# EAGLE board CT_schematic (EAGLE 7.6.0)

Size 100 x 80 mm. Coordinates in mm from the lower left corner, seen from the top.
Outline: 0,0 100,0 100,80 0,80 0,0
Copper layers (1*16): Top 0.035mm / dielectric 1.5mm / Bottom 0.035mm
Design rules "default": minimum track width 10mil, minimum drill 24mil, track to track 8mil, track to pad 8mil, pad to pad 8mil, via to via 8mil, smd to smd 8mil, copper to edge 40mil, drill to drill 8mil, minimum pad ring 10mil, minimum via ring 8mil, stop-mask expansion 4mil, vias tented up to drill 0mil, thermal gap 10mil

## Footprints (pad centres in the part's own frame; a part is rotated, then mirrored left to right if it is on the bottom)
C0603 = smd 0.8 x 0.8: 1 -0.762,0; 2 0.762,0
C0402 = smd 0.5 x 0.5: 1 -0.508,0; 2 0.508,0
C0805 = smd 1.2 x 1.3: 1 -1.016,0; 2 1.016,0
C1206 = smd 1.3 x 1.6: 1 -1.524,0; 2 1.524,0
2220 = smd 1.85 x 5.5: 1 -2.55,0; 2 2.55,0
EXV-9H = smd 3.505 x 1.676: 1 -2.857,0; 2 2.857,0
L0603 = smd 0.8 x 0.8: 1 -0.762,0; 2 0.762,0
R0603 = smd 0.8 x 0.8: 1 -0.762,0; 2 0.762,0
L1210 = smd 1.2 x 2.5: 1 -1.524,0; 2 1.524,0
DR1040 = smd 1.6 x 3.2: 1 -4.458,0; 2 4.458,0
PJ-037B_PACKAGE = drill 3.7 square: 1 12,0 | drill 3.2 square: 2 6,0
LQFP100 = smd 0.3 x 1.2: 1 -6,-7.75; 2 -5.5,-7.75; 3 -5,-7.75; 4 -4.5,-7.75; 5 -4,-7.75; 6 -3.5,-7.75; 7 -3,-7.75; 8 -2.5,-7.75; 9 -2,-7.75; 10 -1.5,-7.75; 11 -1,-7.75; 12 -0.5,-7.75; 13 0,-7.75; 14 0.5,-7.75; 15 1,-7.75; 16 1.5,-7.75; 17 2,-7.75; 18 2.5,-7.75; 19 3,-7.75; 20 3.5,-7.75; 21 4,-7.75; 22 4.5,-7.75; 23 5,-7.75; 24 5.5,-7.75; 25 6,-7.75; 51 6,7.75; 52 5.5,7.75; 53 5,7.75; 54 4.5,7.75; 55 4,7.75; 56 3.5,7.75; 57 3,7.75; 58 2.5,7.75; 59 2,7.75; 60 1.5,7.75; 61 1,7.75; 62 0.5,7.75; 63 0,7.75; 64 -0.5,7.75; 65 -1,7.75; 66 -1.5,7.75; 67 -2,7.75; 68 -2.5,7.75; 69 -3,7.75; 70 -3.5,7.75; 71 -4,7.75; 72 -4.5,7.75; 73 -5,7.75; 74 -5.5,7.75; 75 -6,7.75 | smd 1.2 x 0.3: 26 7.75,-6; 27 7.75,-5.5; 28 7.75,-5; 29 7.75,-4.5; 30 7.75,-4; 31 7.75,-3.5; 32 7.75,-3; 33 7.75,-2.5; 34 7.75,-2; 35 7.75,-1.5; 36 7.75,-1; 37 7.75,-0.5; 38 7.75,0; 39 7.75,0.5; 40 7.75,1; 41 7.75,1.5; 42 7.75,2; 43 7.75,2.5; 44 7.75,3; 45 7.75,3.5; 46 7.75,4; 47 7.75,4.5; 48 7.75,5; 49 7.75,5.5; 50 7.75,6; 76 -7.75,6; 77 -7.75,5.5; 78 -7.75,5; 79 -7.75,4.5; 80 -7.75,4; 81 -7.75,3.5; 82 -7.75,3; 83 -7.75,2.5; 84 -7.75,2; 85 -7.75,1.5; 86 -7.75,1; 87 -7.75,0.5; 88 -7.75,0; 89 -7.75,-0.5; 90 -7.75,-1; 91 -7.75,-1.5; 92 -7.75,-2; 93 -7.75,-2.5; 94 -7.75,-3; 95 -7.75,-3.5; 96 -7.75,-4; 97 -7.75,-4.5; 98 -7.75,-5; 99 -7.75,-5.5; 100 -7.75,-6
QFN-32 = smd 0.6 x 0.3: 1 -2.3,1.75; 2 -2.3,1.25; 3 -2.3,0.75; 4 -2.3,0.25; 5 -2.3,-0.25; 6 -2.3,-0.75; 7 -2.3,-1.25; 8 -2.3,-1.75; 17 2.3,-1.75; 18 2.3,-1.25; 19 2.3,-0.75; 20 2.3,-0.25; 21 2.3,0.25; 22 2.3,0.75; 23 2.3,1.25; 24 2.3,1.75 | smd 0.3 x 0.6: 9 -1.75,-2.3; 10 -1.25,-2.3; 11 -0.75,-2.3; 12 -0.25,-2.3; 13 0.25,-2.3; 14 0.75,-2.3; 15 1.25,-2.3; 16 1.75,-2.3; 25 1.75,2.3; 26 1.25,2.3; 27 0.75,2.3; 28 0.25,2.3; 29 -0.25,2.3; 30 -0.75,2.3; 31 -1.25,2.3; 32 -1.75,2.3 | smd 3.2 x 3.2: EXP 0,0
7498011122R = smd 0.71 x 2.29: 1 -3.545,-3.18; 2 -2.525,-3.18; 3 -1.505,-3.18; 4 -0.485,-3.18; 5 0.535,-3.18; 6 1.555,-3.18; 8 3.595,-3.18; 9 5.635,-3.18; 10 6.655,-3.18; 11 -6.605,-3.18; 12 -5.585,-3.18 | smd 1.4 x 2.54: 13 -8.51,10.2; 14 8.51,10.2 | hole 1.4: -3.5,0; 3.5,0
SSOP-16 = smd 1.981 x 0.356: 1 -2.464,2.223; 2 -2.464,1.587; 3 -2.464,0.953; 4 -2.464,0.318; 5 -2.464,-0.318; 6 -2.464,-0.953; 7 -2.464,-1.587; 8 -2.464,-2.223; 9 2.464,-2.223; 10 2.464,-1.587; 11 2.464,-0.953; 12 2.464,-0.318; 13 2.464,0.318; 14 2.464,0.953; 15 2.464,1.587; 16 2.464,2.223
HTSS-105-01-G-D = drill 1 pad 1.8 square: 1 0,0 | drill 1 pad 1.8: 2 0,2.54; 3 2.54,0; 4 2.54,2.54; 5 5.08,0; 6 5.08,2.54; 7 7.62,0; 8 7.62,2.54; 9 10.16,0; 10 10.16,2.54
SJ-43515TS-SMT-TR = smd 2.2 x 3: 1 0.6,-7.4; 4 3.4,-7.4 | smd 3 x 3: 2 12.8,-7.4; 5 17,-3 | smd 2 x 3: 3 5.3,0; 6 2.5,0 | drill 1.8: P$7 4.5,-3.69; P$8 11.54,-3.69
WM-64PC = drill 0.6 pad 1: 1 -1,0.95; 2 -1,-0.95
ABLS-25.000MHZ-B2F-T = smd 5.6 x 2.8: 1 -3.81,0; 2 5.69,0
ASEK = smd 1.4 x 1: 1 -1.1,-0.8; 2 1.1,-0.8; 3 1.1,0.8; 4 -1.1,0.8
ASFL1 = smd 1.7 x 1.5: 1 -1.27,-1.1; 2 1.27,-1.1; 3 1.27,1.1; 4 -1.27,1.1
IDT74FCT38072 = smd 0.51 x 1: 1 0,0; 2 1.27,0; 3 2.54,0; 4 3.81,0; 5 3.81,4.95; 6 2.54,4.95; 7 1.27,4.95; 8 0,4.95
WSON-8 = smd 0.3 x 0.6: 1 -0.75,0; 2 0.05,0; 3 0.85,0; 4 1.65,0; 5 1.65,3.8; 6 0.85,3.8; 7 0.05,3.8; 8 -0.75,3.8 | smd 3 x 2.6: PAD 0.45,1.9
QFN-16_EP = smd 0.805 x 0.3: 1 -1.452,0.75; 2 -1.452,0.25; 3 -1.452,-0.25; 4 -1.452,-0.75; 9 1.452,-0.75; 10 1.452,-0.25; 11 1.452,0.25; 12 1.452,0.75 | smd 0.3 x 0.805: 5 -0.75,-1.452; 6 -0.25,-1.452; 7 0.25,-1.452; 8 0.75,-1.452; 13 0.75,1.452; 14 0.25,1.452; 15 -0.25,1.452; 16 -0.75,1.452 | smd 1.55 x 1.55: 17 0,0
SON-6 = smd 0.55 x 0.3: 1 -0.355,0.5 | smd 0.52 x 0.3: 2 -0.37,0; 3 -0.37,-0.5; 4 0.37,-0.5; 5 0.37,0; 6 0.37,0.5
SW_4-1437565-2 = smd 1.4 x 2.1: 1 -2.23,4.55; 2 -2.23,-4.55; 3 2.23,4.55; 4 2.23,-4.55
LGM67K-G1J2-24-Z = smd 0.8 x 1.4: A -2,0; C 0,0
NC7SZ125M5X = smd 1.3 x 0.7: 1 -1.3,0.95; 2 -1.3,0; 3 -1.3,-0.95; 4 1.3,-0.95; 5 1.3,0.95

## Placement (x,y rotation side)
C1  1e-06  [C0603]  -93.98,99.06 0 top  (outside the outline)
C2  1e-07  [C0603]  -97.79,99.06 0 top  (outside the outline)
C3  1e-07  [C0603]  -101.6,99.06 0 top  (outside the outline)
C4  1e-07  [C0603]  -15.24,104.14 0 top  (outside the outline)
C5  1e-07  [C0603]  -19.05,104.14 0 top  (outside the outline)
C6  1e-07  [C0603]  -22.86,104.14 0 top  (outside the outline)
C7  1e-07  [C0603]  -26.67,104.14 0 top  (outside the outline)
C8  4.7e-06  [C0603]  -74.93,99.06 0 top  (outside the outline)
C9  2.2e-06  [C0603]  -78.74,99.06 0 top  (outside the outline)
C10  2.2e-06  [C0603]  -82.55,99.06 0 top  (outside the outline)
C11  1e-08  [C0603]  -30.48,104.14 0 top  (outside the outline)
C12  1e-06  [C0603]  -34.29,104.14 0 top  (outside the outline)
C13  1e-11  [C0402]  -60.96,114.3 0 top  (outside the outline)
C14  1e-11  [C0402]  -64.77,114.3 0 top  (outside the outline)
C15  1e-07  [C0402]  -68.58,114.3 0 top  (outside the outline)
C16  1e-07  [C0402]  -72.39,114.3 0 top  (outside the outline)
C17  2.2e-06  [C0603]  -86.36,99.06 0 top  (outside the outline)
C18  1e-07  [C0402]  -76.2,114.3 0 top  (outside the outline)
C19  1e-07  [C0402]  -80.01,114.3 0 top  (outside the outline)
C20  1e-05  [C0805]  -93.98,91.44 0 top  (outside the outline)
C21  1e-07  [C0402]  -83.82,114.3 0 top  (outside the outline)
C22  2.2e-11  [C0402]  -53.34,114.3 0 top  (outside the outline)
C23  2.2e-11  [C0402]  -57.15,114.3 0 top  (outside the outline)
C24  1e-06  [C0603]  -38.1,104.14 0 top  (outside the outline)
C25  1e-06  [C0603]  -41.91,104.14 0 top  (outside the outline)
C26  2.2e-07  [C0603]  -90.17,99.06 0 top  (outside the outline)
C27  1e-06  [C0603]  -45.72,104.14 0 top  (outside the outline)
C28  1e-06  [C0603]  -49.53,104.14 0 top  (outside the outline)
C29  1e-06  [C0603]  -53.34,104.14 0 top  (outside the outline)
C30  1e-06  [C0603]  -57.15,104.14 0 top  (outside the outline)
C31  1e-06  [C0603]  -60.96,104.14 0 top  (outside the outline)
C32  1e-06  [C0603]  -64.77,104.14 0 top  (outside the outline)
C33  1e-06  [C0603]  -68.58,104.14 0 top  (outside the outline)
C34  1e-06  [C0603]  -72.39,104.14 0 top  (outside the outline)
C35  1e-06  [C0603]  -76.2,104.14 0 top  (outside the outline)
C36  1e-07  [C0402]  -87.63,114.3 0 top  (outside the outline)
C37  1e-07  [C0402]  -91.44,114.3 0 top  (outside the outline)
C38  1e-07  [C0402]  -95.25,114.3 0 top  (outside the outline)
C39  1e-07  [C0402]  -99.06,114.3 0 top  (outside the outline)
C40  1e-06  [C0603]  -80.01,104.14 0 top  (outside the outline)
C41  1e-06  [C0603]  -83.82,104.14 0 top  (outside the outline)
C42  1e-06  [C0603]  -87.63,104.14 0 top  (outside the outline)
C43  1e-06  [C0603]  -91.44,104.14 0 top  (outside the outline)
C44  1e-06  [C0603]  -95.25,104.14 0 top  (outside the outline)
C45  1e-06  [C0603]  -99.06,104.14 0 top  (outside the outline)
C46  1e-06  [C0603]  -102.87,104.14 0 top  (outside the outline)
C47  1e-06  [C0603]  -15.24,109.22 0 top  (outside the outline)
C48  1e-07  [C0402]  -102.87,114.3 0 top  (outside the outline)
C49  1e-07  [C0402]  -15.24,119.38 0 top  (outside the outline)
C50  1e-07  [C0402]  -19.05,119.38 0 top  (outside the outline)
C51  1e-07  [C0402]  -22.86,119.38 0 top  (outside the outline)
C52  1e-06  [C0603]  -19.05,109.22 0 top  (outside the outline)
C53  1e-08  [C0402]  -26.67,119.38 0 top  (outside the outline)
C54  1e-08  [C0402]  -30.48,119.38 0 top  (outside the outline)
C55  1e-08  [C0402]  -34.29,119.38 0 top  (outside the outline)
C56  1e-08  [C0402]  -38.1,119.38 0 top  (outside the outline)
C57  1e-08  [C0402]  -41.91,119.38 0 top  (outside the outline)
C58  1e-05  [C1206]  -76.2,91.44 0 top  (outside the outline)
C59  1e-05  [C0805]  -99.06,91.44 0 top  (outside the outline)
C60  1e-05  [C0805]  -15.24,99.06 0 top  (outside the outline)
C61  1e-06  [C0603]  -22.86,109.22 0 top  (outside the outline)
C62  1e-07  [C0402]  -45.72,119.38 0 top  (outside the outline)
C63  6.8e-05  [2220]  -50.8,72.39 0 top  (outside the outline)
C64  1e-07  [C0402]  -49.53,119.38 0 top  (outside the outline)
C65  0.0001  [EXV-9H]  -73.66,82.55 0 top  (outside the outline)
C66  0.0001  [EXV-9H]  -85.09,82.55 0 top  (outside the outline)
C67  1e-08  [C0402]  -53.34,119.38 0 top  (outside the outline)
C68  1e-08  [C0402]  -57.15,119.38 0 top  (outside the outline)
F1  240.0  [L0603]  -26.67,109.22 0 top  (outside the outline)
I1  97.0  [R0603]  -30.48,109.22 0 top  (outside the outline)
I5  1e-05  [L1210]  -69.85,91.44 0 top  (outside the outline)
I6  3.8e-06  [DR1040]  -19.05,62.23 0 top  (outside the outline)
J1  PJ-037B  [PJ-037B_PACKAGE]  -83.82,49.53 0 top  (outside the outline)
R2  1000.0  [R0603]  -34.29,109.22 0 top  (outside the outline)
R4  4700.0  [R0603]  -38.1,109.22 0 top  (outside the outline)
R5  4700.0  [R0603]  -41.91,109.22 0 top  (outside the outline)
R6  2200.0  [R0603]  -45.72,109.22 0 top  (outside the outline)
R7  2200.0  [R0603]  -49.53,109.22 0 top  (outside the outline)
R8  10000.0  [R0603]  -45.72,99.06 0 top  (outside the outline)
R9  10000.0  [R0603]  -50.8,99.06 0 top  (outside the outline)
R10  0.1  [R0603]  -53.34,109.22 0 top  (outside the outline)
R11  0.1  [R0603]  -57.15,109.22 0 top  (outside the outline)
R12  200.0  [R0603]  -60.96,109.22 0 top  (outside the outline)
R13  220.0  [R0603]  -64.77,109.22 0 top  (outside the outline)
R14  6490.0  [R0603]  -68.58,109.22 0 top  (outside the outline)
R15  4700.0  [R0603]  -72.39,109.22 0 top  (outside the outline)
R16  4700.0  [R0603]  -76.2,109.22 0 top  (outside the outline)
R17  1000.0  [R0603]  -80.01,109.22 0 top  (outside the outline)
R18  4700.0  [R0603]  -83.82,109.22 0 top  (outside the outline)
R19  1000.0  [R0603]  -87.63,109.22 0 top  (outside the outline)
R20  4700.0  [R0603]  -91.44,109.22 0 top  (outside the outline)
R21  1000.0  [R0603]  -95.25,109.22 0 top  (outside the outline)
R22  4700.0  [R0603]  -99.06,109.22 0 top  (outside the outline)
R23  4700.0  [R0603]  -102.87,109.22 0 top  (outside the outline)
R24  4700.0  [R0603]  -15.24,114.3 0 top  (outside the outline)
R25  100000.0  [R0603]  -20.32,99.06 0 top  (outside the outline)
R26  1270.0  [R0603]  -19.05,114.3 0 top  (outside the outline)
R27  1270.0  [R0603]  -22.86,114.3 0 top  (outside the outline)
R28  1270.0  [R0603]  -26.67,114.3 0 top  (outside the outline)
R29  1270.0  [R0603]  -30.48,114.3 0 top  (outside the outline)
R30  100000.0  [R0603]  -25.4,99.06 0 top  (outside the outline)
R31  200.0  [R0603]  -34.29,114.3 0 top  (outside the outline)
R32  1000.0  [R0603]  -38.1,114.3 0 top  (outside the outline)
R33  20000.0  [R0603]  -55.88,99.06 0 top  (outside the outline)
R34  91000.0  [R0603]  -60.96,99.06 0 top  (outside the outline)
R35  300000.0  [R0603]  -30.48,99.06 0 top  (outside the outline)
R36  10000.0  [R0603]  -66.04,99.06 0 top  (outside the outline)
R37  10000.0  [R0603]  -71.12,99.06 0 top  (outside the outline)
R38  9100.0  [R0603]  -41.91,114.3 0 top  (outside the outline)
R39  680000.0  [R0603]  -35.56,99.06 0 top  (outside the outline)
R40  120000.0  [R0603]  -40.64,99.06 0 top  (outside the outline)
U1  STM32F437VIT6  [LQFP100]  -43.18,8.89 0 top  (outside the outline)
U2  KSZ8081RNBIA-TR  [QFN-32]  -77.47,62.23 0 top  (outside the outline)
U3  7498011122R  [7498011122R]  -22.86,7.62 0 top  (outside the outline)
U4  LTC2804CGN-1#PBF  [SSOP-16]  -40.64,62.23 0 top  (outside the outline)
U5  HTSS-105-01-G-D  [HTSS-105-01-G-D]  -43.18,71.12 0 top  (outside the outline)
U6  SGTL5000XNAA3  [QFN-32]  -92.71,62.23 0 top  (outside the outline)
U7  SJ-43515TS-SMT-TR  [SJ-43515TS-SMT-TR]  -78.74,10.16 0 top  (outside the outline)
U8  SJ-43515TS-SMT-TR  [SJ-43515TS-SMT-TR]  -39.37,38.1 0 top  (outside the outline)
U9  SJ-43515TS-SMT-TR  [SJ-43515TS-SMT-TR]  -67.31,38.1 0 top  (outside the outline)
U10  WM-64PCT  [WM-64PC]  -52.07,62.23 0 top  (outside the outline)
U11  SGTL5000XNAA3  [QFN-32]  -22.86,73.66 0 top  (outside the outline)
U12  SJ-43515TS-SMT-TR  [SJ-43515TS-SMT-TR]  -95.25,38.1 0 top  (outside the outline)
U13  SJ-43515TS-SMT-TR  [SJ-43515TS-SMT-TR]  -39.37,52.07 0 top  (outside the outline)
U14  SJ-43515TS-SMT-TR  [SJ-43515TS-SMT-TR]  -67.31,52.07 0 top  (outside the outline)
U15  WM-64PCT  [WM-64PC]  -62.23,62.23 0 top  (outside the outline)
U16  ABLS-25.000MHZ-B2F-T  [ABLS-25.000MHZ-B2F-T]  -26.67,92.71 0 top  (outside the outline)
U17  ABLS-25.000MHZ-B2F-T  [ABLS-25.000MHZ-B2F-T]  -46.99,92.71 0 top  (outside the outline)
U18  ASEK-32.768KHz-ECST  [ASEK]  -64.77,82.55 0 top  (outside the outline)
U19  ASFL-24.57MHZ-NCS  [ASFL1]  -90.17,72.39 0 top  (outside the outline)
U20  idt74fct38072  [IDT74FCT38072]  -46.99,80.01 0 top  (outside the outline)
U21  ASFL1-50MHZ-NCS  [ASFL1]  -26.67,83.82 0 top  (outside the outline)
U22  LP3878SDX-ADJ/NOPB  [WSON-8]  -72.39,71.12 0 top  (outside the outline)
U23  LTC3601EUD#PBF  [QFN-16_EP]  -46.99,114.3 0 top  (outside the outline)
U24  TPS3895ADRYR  [SON-6]  -59.69,118.11 0 top  (outside the outline)
U25  4-1437565-2  [SW_4-1437565-2]  -100.33,49.53 0 top  (outside the outline)
U26  Q65110A2395  [LGM67K-G1J2-24-Z]  -58.42,91.44 0 top  (outside the outline)
U27  nc7sz125m5x  [NC7SZ125M5X]  -81.28,90.17 0 top  (outside the outline)
U28  nc7sz125m5x  [NC7SZ125M5X]  -87.63,90.17 0 top  (outside the outline)

## Library data of the parts
C1-C68 F1 I1 I5 I6 J1 R2 R4-R40 U1-U28 = circuit_tree

## Nets
CLK_CRYSTAL_U1_12: C13.1 U1.12 U16.1
CLK_CRYSTAL_U1_13: C14.1 U1.13 U16.2
CLK_CRYSTAL_U2_8: C22.1 U2.8 U17.2
CLK_CRYSTAL_U2_9: C23.1 U2.9 U17.1
CLK_U1_8: U1.8 U18.3
CLK_U1_24: U1.24 U21.3
CLK_U6_21: U6.21 U20.7
CLK_U11_21: U11.21 U20.6
CLK_U20_3: U19.3 U20.3
GND: C1.2 C2.2 C3.2 C4.2 C5.2 C6.2 C7.2 C8.2 C9.2 C10.2 C11.2 C12.2 C13.2 C14.2 C15.2 C16.2 C17.2 C18.2 C19.2 C20.2 C21.2 C22.2 C23.2 C24.2 C25.2 C27.2 C28.2 C36.2 C37.2 C38.2 C39.2 C40.2 C48.2 C49.2 C50.2 C51.2 C52.2 C53.2 C54.2 C55.2 C56.2 C57.2 C58.2 C59.2 C60.2 C61.2 C63.1 C63.2 C64.2 C65.2 C66.2 C67.2 C68.2 J1.2 R2.2 R9.2 R10.2 R11.2 R14.2 R16.2 R17.2 R19.2 R21.2 R27.2 R29.2 R32.2 R33.2 R35.2 R38.2 R40.2 U1.10 U1.20 U1.27 U1.74 U1.99 U2.1 U2.EXP U3.1 U3.10 U4.8 U5.9 U6.1 U6.3 U6.7 U6.EXP U8.1 U9.1 U10.2 U11.1 U11.3 U11.7 U11.EXP U13.1 U14.1 U15.2 U18.2 U19.2 U20.4 U20.5 U20.8 U21.2 U22.3 U22.PAD U23.1 U23.9 U23.17 U24.2 U26.C U27.1 U27.3 U28.1 U28.3
NET_U1_14: R5.1 U1.14 U28.4
NET_U1_16: R6.1 U1.16 U2.12
NET_U1_22: C11.1 C12.1 F1.1 U1.21 U1.22
NET_U1_25: R7.1 U1.25 U2.11
NET_U1_37: R9.1 U1.37
NET_U1_49: C9.1 U1.49
NET_U1_73: C10.1 U1.73
NET_U1_94: R8.1 U1.94
NET_U1_97: U26.A
NET_U1_98: U25.3 U25.4
NET_U2_2: C17.1 C18.1 U2.2
NET_U2_3: C19.1 I1.1 U2.3
NET_U2_10: R14.1 U2.10
NET_U2_13: R17.1 U2.13
NET_U2_14: R18.1 U2.14
NET_U2_19: R16.1 U2.19
NET_U2_20: R22.1 U2.20
NET_U2_21: R15.1 U2.21
NET_U2_28: R20.1 U2.28
NET_U2_29: R21.1 U2.29
NET_U2_31: R23.1 U2.31
NET_U2_32: R4.1 U2.32 U27.4
NET_U3_1: U2.7 U3.1
NET_U3_2: C15.1 U3.2
NET_U3_3: U2.6 U3.3
NET_U3_4: U2.5 U3.4
NET_U3_5: C16.1 U3.5
NET_U3_6: U2.4 U3.6
NET_U3_8: R11.1 U3.8
NET_U3_9: R12.1 U3.9
NET_U3_12: R13.1 U3.12
NET_U3_13: R10.1 U3.13 U3.14
NET_U3_30: R12.2
NET_U3_31: R13.2
NET_U4_6: C24.1 U4.6
NET_U4_7: C26.1 I5.2 U4.7
NET_U4_9: C25.1 U4.9
NET_U4_10: C26.2 U4.10
NET_U4_11: R25.1 U4.11
NET_U5_3: U4.1 U5.3
NET_U5_4: U4.2 U5.4
NET_U5_5: U4.3 U5.5
NET_U5_6: U4.4 U5.6
NET_U6_10: C39.1 U6.10
NET_U6_29: R26.1 U6.29
NET_U6_31: R27.1 U6.31
NET_U7_1: U6.4 U7.1
NET_U7_2: U6.2 U7.2
NET_U7_5: U6.6 U7.5
NET_U8_2: C30.1 U8.2
NET_U8_5: C29.1 U8.5
NET_U8_11: C30.2
NET_U8_12: C29.2
NET_U9_2: C32.1 C33.1 U9.2
NET_U9_5: C31.1 U9.5
NET_U9_13: C32.2 C33.2
NET_U9_14: C31.2
NET_U10_1: C34.1 C35.1 C40.1 U6.16 U10.1
NET_U10_15: C34.2 C35.2
NET_U11_10: C51.1 U11.10
NET_U11_29: R28.1 U11.29
NET_U11_31: R29.1 U11.31
NET_U12_1: U11.4 U12.1
NET_U12_2: U11.2 U12.2
NET_U12_5: U11.6 U12.5
NET_U13_2: C42.1 U13.2
NET_U13_5: C41.1 U13.5
NET_U13_11: C42.2
NET_U13_12: C41.2
NET_U14_2: C44.1 C45.1 U14.2
NET_U14_5: C43.1 U14.5
NET_U14_13: C44.2 C45.2
NET_U14_14: C43.2
NET_U15_1: C46.1 C47.1 C52.1 U11.16 U15.1
NET_U15_15: C46.2 C47.2
NET_U22_1: C57.1 U22.1
NET_U22_6: R31.2 R32.1 U22.6
NET_U22_8: R30.1 U22.8
NET_U23_3: C62.2 I6.1 U23.3 U23.4
NET_U23_6: C62.1 U23.6
NET_U23_7: C61.1 U23.7 U23.12
NET_U23_10: R35.1 U23.10
NET_U23_11: R33.1 R34.1 U23.11
NET_U23_14: U23.14
NET_U23_ATNET_3: I6.2 R34.2
NET_U24_1: R37.1 R38.1 U24.1
NET_U24_3: R39.2 R40.1 U24.3
NET_U24_4: R36.1 U24.4 U27.2 U28.2
NET_U25_1: R2.1 U25.1 U25.2
PROC_ETH_CRS_DV: U1.32 U2.18
PROC_ETH_RXD0: R24.1 U1.33 U2.16
PROC_ETH_RXD1: R19.1 U1.34 U2.15
PROC_ETH_TX_EN: U1.48 U2.23
PROC_ETH_TXD0: U1.51 U2.24
PROC_ETH_TXD1: U1.52 U2.25
PROC_I2S2_CK: U1.47 U6.24
PROC_I2S2_EXT_SD: U1.17 U6.25
PROC_I2S2_SD: U1.18 U6.26
PROC_I2S2_WS: U1.96 U6.23
PROC_I2S3_CK: U1.78 U11.24
PROC_I2S3_EXT_SD: U1.90 U11.25
PROC_I2S3_SD: U1.80 U11.26
PROC_I2S3_WS: U1.29 U11.23
PROC_UART4_RX: U1.79 U4.16
PROC_UART4_TX: U1.23 U4.14
VCC_S1_9V9: C58.1 C60.1 C65.1 C66.1 J1.1 R30.2 U22.4 U23.15 U23.16
VCC_TIER1_1V2: C36.1 C48.1 C59.1 R31.1 U6.30 U11.30 U22.5
VCC_TIER1_3V3: C1.1 C2.1 C3.1 C4.1 C5.1 C6.1 C7.1 C8.1 C20.1 C21.1 C27.1 C28.1 C37.1 C38.1 C49.1 C50.1 C53.1 C54.1 C55.1 C56.1 C63.2 C64.1 C67.1 C68.1 F1.2 I1.2 I5.1 I6.2 R4.2 R5.2 R6.2 R7.2 R8.2 R15.2 R18.2 R20.2 R22.2 R23.2 R24.2 R25.2 R26.2 R28.2 R34.2 R36.2 R37.2 R39.1 U1.6 U1.11 U1.19 U1.28 U1.50 U1.75 U1.100 U2.17 U4.5 U4.12 U6.5 U6.20 U11.5 U11.20 U18.4 U19.4 U20.1 U20.2 U21.4 U23.8 U24.6 U27.5 U28.5

## Tracks (layer width: path | path; a pad name or v marks a point on that pad's centre or on a via)
CLK_CRYSTAL_U1_12  (2 unrouted)
CLK_CRYSTAL_U1_13  (2 unrouted)
CLK_CRYSTAL_U2_8  (2 unrouted)
CLK_CRYSTAL_U2_9  (2 unrouted)
CLK_U1_8  (1 unrouted)
CLK_U1_24  (1 unrouted)
CLK_U6_21  (1 unrouted)
CLK_U11_21  (1 unrouted)
CLK_U20_3  (1 unrouted)
GND  (111 unrouted)
NET_U1_14  (2 unrouted)
NET_U1_16  (2 unrouted)
NET_U1_22  (4 unrouted)
NET_U1_25  (2 unrouted)
NET_U1_37  (1 unrouted)
NET_U1_49  (1 unrouted)
NET_U1_73  (1 unrouted)
NET_U1_94  (1 unrouted)
NET_U1_98  (1 unrouted)
NET_U2_2  (2 unrouted)
NET_U2_3  (2 unrouted)
NET_U2_10  (1 unrouted)
NET_U2_13  (1 unrouted)
NET_U2_14  (1 unrouted)
NET_U2_19  (1 unrouted)
NET_U2_20  (1 unrouted)
NET_U2_21  (1 unrouted)
NET_U2_28  (1 unrouted)
NET_U2_29  (1 unrouted)
NET_U2_31  (1 unrouted)
NET_U2_32  (2 unrouted)
NET_U3_1  (1 unrouted)
NET_U3_2  (1 unrouted)
NET_U3_3  (1 unrouted)
NET_U3_4  (1 unrouted)
NET_U3_5  (1 unrouted)
NET_U3_6  (1 unrouted)
NET_U3_8  (1 unrouted)
NET_U3_9  (1 unrouted)
NET_U3_12  (1 unrouted)
NET_U3_13  (2 unrouted)
NET_U4_6  (1 unrouted)
NET_U4_7  (2 unrouted)
NET_U4_9  (1 unrouted)
NET_U4_10  (1 unrouted)
NET_U4_11  (1 unrouted)
NET_U5_3  (1 unrouted)
NET_U5_4  (1 unrouted)
NET_U5_5  (1 unrouted)
NET_U5_6  (1 unrouted)
NET_U6_10  (1 unrouted)
NET_U6_29  (1 unrouted)
NET_U6_31  (1 unrouted)
NET_U7_1  (1 unrouted)
NET_U7_2  (1 unrouted)
NET_U7_5  (1 unrouted)
NET_U8_2  (1 unrouted)
NET_U8_5  (1 unrouted)
NET_U9_2  (2 unrouted)
NET_U9_5  (1 unrouted)
NET_U9_13  (1 unrouted)
NET_U10_1  (4 unrouted)
NET_U10_15  (1 unrouted)
NET_U11_10  (1 unrouted)
NET_U11_29  (1 unrouted)
NET_U11_31  (1 unrouted)
NET_U12_1  (1 unrouted)
NET_U12_2  (1 unrouted)
NET_U12_5  (1 unrouted)
NET_U13_2  (1 unrouted)
NET_U13_5  (1 unrouted)
NET_U14_2  (2 unrouted)
NET_U14_5  (1 unrouted)
NET_U14_13  (1 unrouted)
NET_U15_1  (4 unrouted)
NET_U15_15  (1 unrouted)
NET_U22_1  (1 unrouted)
NET_U22_6  (2 unrouted)
NET_U22_8  (1 unrouted)
NET_U23_3  (3 unrouted)
NET_U23_6  (1 unrouted)
NET_U23_7  (2 unrouted)
NET_U23_10  (1 unrouted)
NET_U23_11  (2 unrouted)
NET_U23_ATNET_3  (1 unrouted)
NET_U24_1  (2 unrouted)
NET_U24_3  (2 unrouted)
NET_U24_4  (3 unrouted)
NET_U25_1  (2 unrouted)
PROC_ETH_CRS_DV  (1 unrouted)
PROC_ETH_RXD0  (2 unrouted)
PROC_ETH_RXD1  (2 unrouted)
PROC_ETH_TX_EN  (1 unrouted)
PROC_ETH_TXD0  (1 unrouted)
PROC_ETH_TXD1  (1 unrouted)
PROC_I2S2_CK  (1 unrouted)
PROC_I2S2_EXT_SD  (1 unrouted)
PROC_I2S2_SD  (1 unrouted)
PROC_I2S2_WS  (1 unrouted)
PROC_I2S3_CK  (1 unrouted)
PROC_I2S3_EXT_SD  (1 unrouted)
PROC_I2S3_SD  (1 unrouted)
PROC_I2S3_WS  (1 unrouted)
PROC_UART4_RX  (1 unrouted)
PROC_UART4_TX  (1 unrouted)
VCC_S1_9V9  (8 unrouted)
VCC_TIER1_1V2  (6 unrouted)
VCC_TIER1_3V3  (68 unrouted)